# EAGLE board Lab 7 (EAGLE 7.6.0)

Size 56.82 x 53.33 mm. Coordinates in mm from the lower left corner, seen from the top.
Outline: 0,0 56.82,0 56.82,53.33 0,53.33 0,0
Copper layers (1*16): Top 0.035mm / dielectric 1.5mm / Bottom 0.035mm
Design rules "default": minimum track width 10mil, minimum drill 24mil, track to track 8mil, track to pad 8mil, pad to pad 8mil, via to via 8mil, smd to smd 8mil, copper to edge 40mil, drill to drill 8mil, minimum pad ring 10mil, minimum via ring 8mil, stop-mask expansion 4mil, vias tented up to drill 0mil, thermal gap 10mil

## Footprints (pad centres in the part's own frame; a part is rotated, then mirrored left to right if it is on the bottom)
DC-POWER = drill 0.889 pad 2.54 octagon: + 0,2.54; - 0,-2.54
0207/10 = drill 0.813 octagon: 1 -5.08,0; 2 5.08,0

## Placement (x,y rotation side)
FUNC1  [DC-POWER]  5,48.18 0 top
Meter1  [DC-POWER]  5,10.08 0 top
R1  1k‎Ω  [0207/10]  5,22.78 0 top
R2  2.2k‎Ω  [0207/10]  5,35.48 0 top
U1  [DC-POWER]  5,60.88 0 top  (outside the outline)

## Library data of the parts
FUNC1 Meter1 R1 R2 U1 = AUTODESK_CIRCUITS_BREADBOARD

## Nets
N$1: Meter1.+ R1.2 R2.2 U1.+
N$2: FUNC1.- Meter1.- R2.1 U1.-
N$3: FUNC1.+ R1.1

## Tracks (layer width: path | path; a pad name or v marks a point on that pad's centre or on a via)
N$1  (3 unrouted)
N$2  (3 unrouted)
N$3  (1 unrouted)